# Altium PCB pwr_V1.1.PcbDoc (part 1 of 2)
Units mm, origin at the board's own origin, x right, y up, seen from the top; angles counter-clockwise.
Board outline 150.51 x 150.51 mm, 4 copper layers (Top Layer, GND, VCC, Bottom Layer); 133 components, 126 nets, 409 pads, 2275 vias.
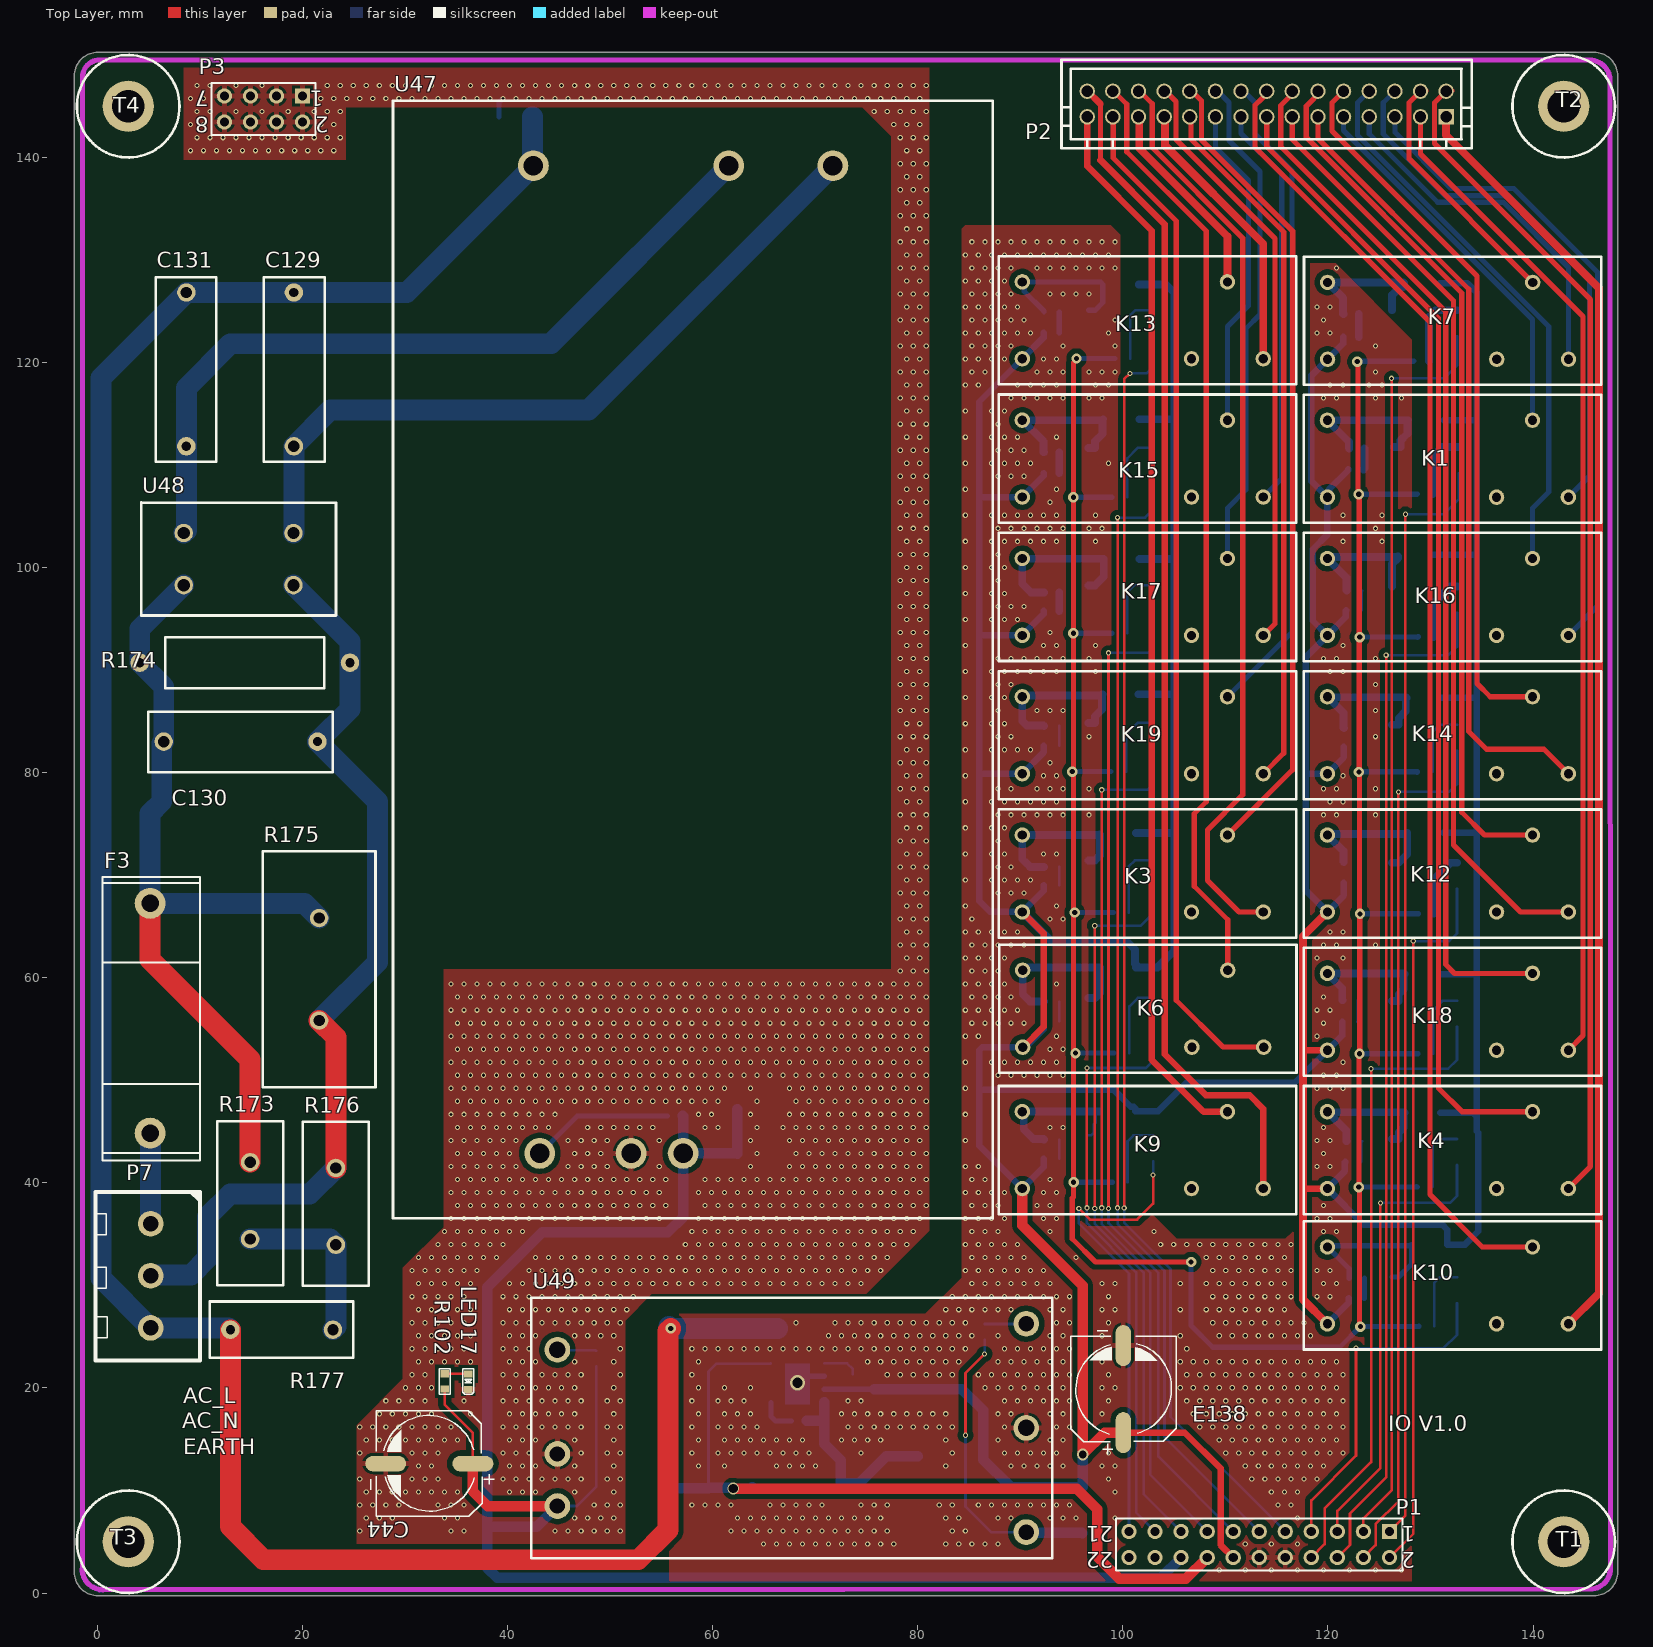
[diagram p0: Top Layer view]
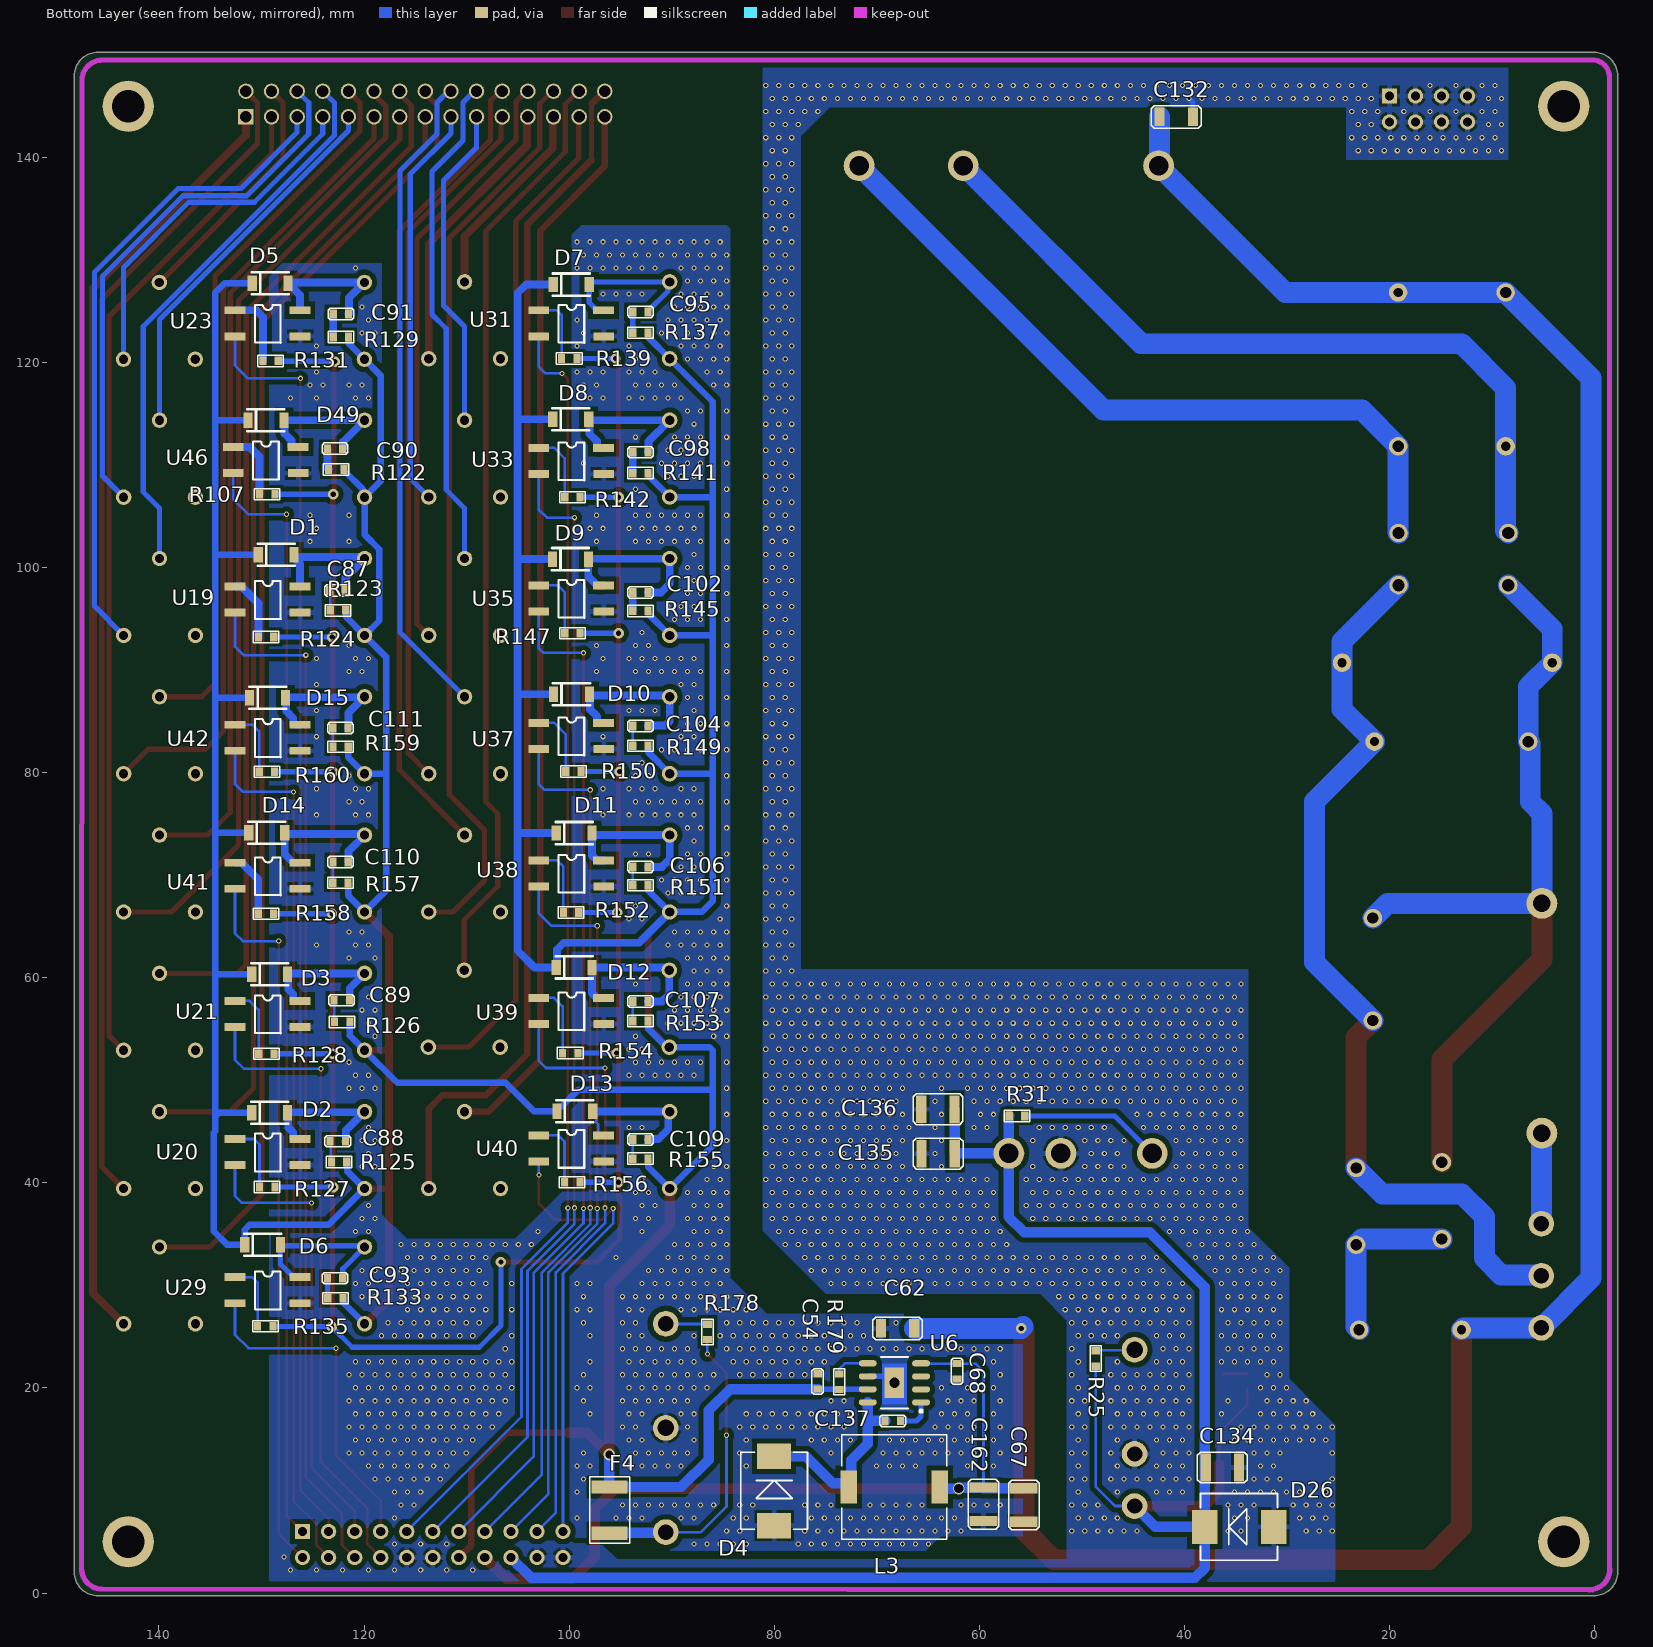
[diagram p1: Bottom Layer view, seen from below]

## Layer stack, top to bottom
Top Solder: solder mask 0.0102, Solder Resist, Dk 3.5
Top Layer: signal copper 0.0356
Dielectric1: core 0.32, FR-4, Dk 4.8
GND: signal copper 0.0356
Dielectric2: prepreg 0.32, FR-4, Dk 4.8
VCC: signal copper 0.0356
Dielectric3: core 0.32, FR-4, Dk 4.8
Bottom Layer: signal copper 0.0356
Bottom Solder: solder mask 0.0102, Solder Resist, Dk 3.5

## Board outline
0,-0.254 cw(c0,2) -2.254,2 -2.254,147.997 -2.254,148 cw(c0,148) 0,150.254 146,150.254 cw(c146,148) 148.254,148 148.254,2 cw(c146,2) 146,-0.254

## Design rules (kind name [scope] priority, off if disabled: settings)
Clearance [InPolygon] p1: gap=0.508 ignorepadtopadclearanceinfootprint=FALSE
Clearance Clearance_1 [All] p2: gap=0.127 ignorepadtopadclearanceinfootprint=FALSE
HoleToHoleClearance [All] p1: gap=0.127 allowstackedmicrovias=TRUE
MinimumSolderMaskSliver [All] p1: minsoldermaskwidth=0.127
PolygonConnect PolygonConnect_1 [IsVia] p1: connectstyle=Direct reliefconductorwidth=0.254 reliefentries=4 polygonreliefangle="90 Angle" airgapwidth=0.254
PolygonConnect [All] p2: connectstyle=Relief reliefconductorwidth=0.508 reliefentries=4 polygonreliefangle="90 Angle" airgapwidth=0.254
RoutingVias [All] p1: holewidth=0.254 width=0.508 viastyle="Through Hole" minholewidth=0.254 minwidth=0.508 maxholewidth=2.54 maxwidth=5.08
SilkToSilkClearance [All] p1: silktosilkclearance=0.127
SilkToSolderMaskClearance SilkscreenOverComponentPads [IsPad] p1: minsilkscreentomaskgap=0 clearancetoexposedcopper=TRUE
SolderMaskExpansion [All] p1: expansion=0.102 istentingtop=FALSE
Width [All] p1: maxlimit=5.08 minlimit=0.254 preferedwidth=0.254
26 further rules are at their usual default settings.

## Classes and differential pairs
net class N000-1_[0..19]: N000-1_0 N000-1_1 N000-1_2 N000-1_3 N000-1_4 N000-1_5 N000-1_6 N000-1_7 N000-1_8 N000-1_9 N000-1_10 N000-1_11 N000-1_12 N000-1_13 N000-1_14 N000-1_15 N000-1_16 N000-1_17 N000-1_18 N000-1_19
net class DO_O[0..19]: DO_O0 DO_O1 DO_O2 DO_O3 DO_O4 DO_O5 DO_O6 DO_O7 DO_O8 DO_O9 DO_O10 DO_O11 DO_O12 DO_O13 DO_O14 DO_O15 DO_O16 DO_O17 DO_O18 DO_O19
net class DO[0..19]: DO0 DO1 DO2 DO3 DO4 DO5 DO6 DO7 DO8 DO9 DO10 DO11 DO12 DO13 DO14 DO15 DO16 DO17 DO18 DO19
net class DI[0..11]: DI0 DI1 DI2 DI3 DI4 DI5 DI6 DI7 DI8 DI9 DI10 DI11
component class relay: K1 K3 K4 K6 K7 K9 K10 K12 K13 K14 K15 K16 K17 K18 K19 P2
component class power: C44 C54 C62 C67 C68 C129 C130 C131 C132 C134 C135 C136 C137 C162 D4 D26 E138 F3 F4 L3 LED17 P7 R25 R31 R102 R173 R174 R175 R176 R177 R178 R179 T1 T2 T3 T4 U6 U47 U48 U49
component class do: C87 C88 C89 C90 C91 C93 C95 C98 C102 C104 C106 C107 C109 C110 C111 D1 D2 D3 D5 D6 D7 D8 D9 D10 D11 D12 D13 D14 D15 D49 F1 P1 P3 R107 R122 R123 R124 R125 R126 R127 R128 R129 R131 R133 R135 R137 R139 R141 R142 R145 R147 R149 R150 R151 R152 R153 R154 R155 R156 R157 R158 R159 R160 U19 U20 U21 U23 U29 U31 U33 U35 U37 U38 U39 U40 U41 U42 U46

## Components (designator, comment, footprint, x,y, rotation, side; value= is the part's Value field where it differs from the comment)
C44 "220uF/50V" Φ10×10 32.36,12.624 r270 top
C54 "1uF" 0603C 75.768,21.387 r270 bottom
C62 "1nF/2kV" 1206C 69.595,25.806 r180 bottom
C67 "22uF/10V" 1210C 55.651,10.21 r270 bottom
C68 "0.1uF" 0603C 62.179,22.379 r270 bottom
C87 "0.1uF" 0603C 121.842,97.765 r0 bottom
C88 "0.1uF" 0603C 121.818,44.069 r0 bottom
C89 "0.1uF" 0603C 121.436,57.81 r0 bottom
C90 "0.1uF" 0603C 122.072,111.608 r0 bottom
C91 "0.1uF" 0603C 121.512,124.739 r0 bottom
C93 "0.1uF" 0603C 122.071,30.704 r0 bottom
C95 "0.1uF" 0603C 92.302,124.943 r0 bottom
C98 "0.1uF" 0603C 92.302,111.252 r0 bottom
C102 "0.1uF" 0603C 92.302,97.587 r0 bottom
C104 "0.1uF" 0603C 92.302,84.557 r0 bottom
C106 "0.1uF" 0603C 92.302,70.815 r0 bottom
C107 "0.1uF" 0603C 92.302,57.683 r0 bottom
C109 "0.1uF" 0603C 92.302,44.221 r0 bottom
C110 "0.1uF" 0603C 121.538,71.298 r0 bottom
C111 "0.1uF" 0603C 121.563,84.353 r0 bottom
C129 "2.2nF/400VAC" 15x18 19.152,126.836 r270 top value=22nF
C130 "0.15μF/300VAC" 15x18 21.458,83.033 r180 top value=22nF
C131 "2.2nF/400VAC" 15x18 8.668,111.836 r90 top value=22nF
C132 "1nF/2KV" 1206C 39.168,143.967 r0 bottom value=22nF
C134 "1uF/50V" 1210C 34.671,12.243 r0 bottom value=22nF
C135 "4.7uF/50V" 1210C 65.632,42.85 r180 bottom value=22nF
C136 "10uF/50V" 1210C 65.659,47.193 r180 bottom value=22nF
C137 "0.01uF" 0603C 69.19,16.789 r180 bottom
C162 "22uF/10V" 1210C 59.588,10.286 r270 bottom
D1 "LL4148" DO-213AB/LL34/MiniMELF 128.577,101.244 r180 bottom
D2 "LL4148" DO-213AB/LL34/MiniMELF 129.212,46.838 r180 bottom
D3 "LL4148" DO-213AB/LL34/MiniMELF 129.21,60.35 r180 bottom
D4 "SS54" SMC 80.01,6.579 r90 bottom
D5 "LL4148" DO-213AB/LL34/MiniMELF 129.159,127.737 r180 bottom
D6 "LL4148" DO-213AB/LL34/MiniMELF 129.896,33.981 r180 bottom
D7 "LL4148" DO-213AB/LL34/MiniMELF 99.797,127.61 r180 bottom
D8 "LL4148" DO-213AB/LL34/MiniMELF 99.847,114.478 r180 bottom
D9 "LL4148" DO-213AB/LL34/MiniMELF 99.873,100.838 r180 bottom
D10 "LL4148" DO-213AB/LL34/MiniMELF 99.771,87.655 r180 bottom
D11 "LL4148" DO-213AB/LL34/MiniMELF 99.517,74.117 r180 bottom
D12 "LL4148" DO-213AB/LL34/MiniMELF 99.517,61.011 r180 bottom
D13 "LL4148" DO-213AB/LL34/MiniMELF 99.441,46.99 r180 bottom
D14 "LL4148" DO-213AB/LL34/MiniMELF 129.489,74.143 r180 bottom
D15 "LL4148" DO-213AB/LL34/MiniMELF 129.413,87.3 r180 bottom
D26 "SMCJ30CA" SMC 31.274,6.452 r0 bottom
D49 "LL4148" DO-213AB/LL34/MiniMELF 129.565,114.376 r180 bottom
E138 "100uF/50V" Φ10×10 100.051,19.888 r180 top value=100pF
F3 "6.3A/250V" 可视开关电源保险丝座 5.131,44.856 r90 top
F4 "2A" 1812-F 96.063,5.842 r90 bottom
K1 "G2RL-1-H" G2RL-1-H 119.949,114.377 r0 top
K3 "G2RL-1-H" G2RL-1-H 90.195,73.921 r0 top
K4 "G2RL-1-H" G2RL-1-H 119.949,46.946 r0 top
K6 "G2RL-1-H" G2RL-1-H 90.231,60.738 r0 top
K7 "G2RL-1-H" G2RL-1-H 119.964,127.82 r0 top
K9 "G2RL-1-H" G2RL-1-H 90.195,46.946 r0 top
K10 "G2RL-1-H" G2RL-1-H 119.949,33.752 r0 top
K12 "G2RL-1-H" G2RL-1-H 119.949,73.919 r0 top
K13 "G2RL-1-H" G2RL-1-H 90.195,127.871 r0 top
K14 "G2RL-1-H" G2RL-1-H 119.949,87.405 r0 top
K15 "G2RL-1-H" G2RL-1-H 90.195,114.383 r0 top
K16 "G2RL-1-H" G2RL-1-H 119.949,100.891 r0 top
K17 "G2RL-1-H" G2RL-1-H 90.195,100.896 r0 top
K18 "G2RL-1-H" G2RL-1-H 119.949,60.432 r0 top
K19 "G2RL-1-H" G2RL-1-H 90.195,87.408 r0 top
L3 "CDRH105NP-100NC" CDRH105 73.396,5.238 r90 bottom
LED17 "5V" 0603LED 36.17,21.363 r270 top
P1 "XHD2.54mm 2*15" HDR2X11 126,6 r180 top locked
P2 "Header 15X2" CONN-TH_30P-P2.50_KH-A2557-2X15A 114.027,145.217 r0 top
P3 "Header 4X2" HDR2X4 20,146 r180 top locked
P7 "Header 3" KF128V-3P 5.188,36.017 r270 top
R25 "NC" 0603R 48.641,22.123 r90 bottom value=100K
R31 "NC" 0603r 55.575,46.533 r0 bottom value=100K
R102 "5.1K" 0603R 33.858,21.388 r270 top
R107 "510" 0603R 130.2,107.163 r180 bottom
R122 "51K" 0603R 123.471,109.576 r180 bottom
R123 "51K" 0603R 123.292,95.834 r180 bottom
R124 "510" 0603R 130.302,93.243 r180 bottom
R125 "51K" 0603R 123.19,42.037 r180 bottom
R126 "51K" 0603R 122.885,55.702 r180 bottom
R127 "510" 0603R 130.202,39.599 r180 bottom
R128 "510" 0603R 130.278,52.603 r180 bottom
R129 "51K" 0603R 123.014,122.504 r180 bottom
R131 "510" 0603R 129.87,120.167 r180 bottom
R133 "51K" 0603R 123.547,28.748 r180 bottom
R135 "510" 0603R 130.38,26.01 r180 bottom
R137 "51K" 0603R 93.802,122.911 r180 bottom
R139 "510" 0603R 100.738,120.396 r180 bottom
R141 "51K" 0603R 93.802,109.22 r180 bottom
R142 "510" 0603R 100.433,106.858 r180 bottom
R145 "51K" 0603R 93.802,95.783 r180 bottom
R147 "510" 0603R 100.432,93.599 r180 bottom
R149 "51K" 0603R 93.802,82.626 r180 bottom
R150 "510" 0603R 100.331,80.112 r180 bottom
R151 "51K" 0603R 93.802,69.037 r180 bottom
R152 "510" 0603R 100.559,66.37 r180 bottom
R153 "51K" 0603R 93.802,55.778 r180 bottom
R154 "510" 0603R 100.636,52.654 r180 bottom
R155 "51K" 0603R 93.802,42.367 r180 bottom
R156 "510" 0603R 100.457,40.056 r180 bottom
R157 "51K" 0603R 123.063,69.266 r180 bottom
R158 "510" 0603R 130.327,66.243 r180 bottom
R159 "51K" 0603R 123.038,82.525 r180 bottom
R160 "510" 0603R 130.226,80.086 r180 bottom
R173 "14D561K" 14D561K 14.891,34.519 r90 top
R174 "1MΩ/2W" 5x15.5 4.121,90.729 r0 top value=100K
R175 "20D471K" 20D471K 21.615,55.829 r90 top
R176 "14D561K" 14D561K 23.248,41.46 r270 top
R177 "B5G3600" B5G3600 12.961,25.679 r0 top
R178 "NC" 0603r 86.512,26.214 r270 bottom value=100K
R179 "100K" 0603R 73.66,21.361 r270 bottom
T1 "TP" M3 143,5 r0 top
T2 "TP" M3 143,145 r0 top
T3 "TP" M3 3,5 r0 top
T4 "TP" M3 3,145 r0 top
U6 "LM22676MRE-5.0/NOPB" SOP127P600X168_HS-8N 68.275,20.498 r0 bottom
U19 "AQY210S" sop4 132.588,98.156 r180 bottom
U20 "AQY210S" sop4 132.588,44.279 r180 bottom
U21 "AQY210S" sop4 132.588,57.749 r180 bottom
U23 "AQY210S" sop4 132.588,125.095 r180 bottom
U29 "AQY210S" sop4 132.588,30.81 r180 bottom
U31 "AQY210S" sop4 102.972,125.095 r180 bottom
U33 "AQY210S" sop4 102.972,111.684 r180 bottom
U35 "AQY210S" sop4 102.972,98.273 r180 bottom
U37 "AQY210S" sop4 102.972,84.861 r180 bottom
U38 "AQY210S" sop4 102.972,71.45 r180 bottom
U39 "AQY210S" sop4 102.972,58.039 r180 bottom
U40 "AQY210S" sop4 102.972,44.628 r180 bottom
U41 "AQY210S" sop4 132.588,71.218 r180 bottom
U42 "AQY210S" sop4 132.588,84.687 r180 bottom
U46 "AQY210S" sop4 132.766,111.76 r180 bottom
U47 "LHE60-20B24" LHE60-20B24 71.726,139.195 r270 top
U48 "FL2D-30-222" TY-100P 19.114,98.298 r180 top
U49 "URB24_LD-50WR3G" URB24_LD-50WR3G 42.316,16.104 r0 top

## Footprints (in the part's own frame and the unit in brackets; to place one, negate y for a bottom-side part, rotate by r counter-clockwise, add the part's x,y. Pads: shape width x height; smd on the part's side, far side on the other; paste and mask are expansions set on the pad)
5x15.5 [mm]
  round 1.8 hole 0.9: 1(0,0) 2(20.5,0)
  silkscreen extent 2.5,-2.5 18,2.5
14D561K [mm]
  round 1.8 hole 1.1: 1(0,0) 2(7.5,0)
  silkscreen extent -4.5,-3.21 11.5,3.21
15x18 [mm]
  round 1.8 hole 0.9: 1(0,0)
  round 1.8 hole 1.1: 2(15,0)
  silkscreen extent -1.5,-2.92 16.5,3
20D471K [mm]
  round 1.8 hole 1.1: 1(0,0) 2(10,0)
  silkscreen extent -6.5,-5.5 16.5,5.5
0603C [mm]
  rect 0.7x0.85 smd: 1(0,0) 2(1.5,0)
  silkscreen extent -0.5,-0.55 2,0.55
0603LED [mm]
  rect 0.7x0.85 smd: 1(0,0) 2(1.5,0)
  silkscreen extent -0.5,-0.55 2,0.55
0603R [mm]
  rect 0.7x0.85 smd: 1(0,0) 2(1.5,0)
  silkscreen extent -0.5,-0.55 2,0.55
0603r [mm]
  rect 0.7x0.85 smd: 1(0,0) 2(1.5,0)
  silkscreen extent -0.5,-0.55 2,0.55
1206C [mm]
  rect 1x1.8 smd: 1(0,0) 2(3.25,0)
  silkscreen extent -0.8,-1.1 4.05,1.1
1210C [mm]
  rect 1x2.7 smd: 1(0,0) 2(3.25,0)
  silkscreen extent -0.8,-1.5 4.05,1.5
1812-F [mm]
  rect 1.3x3.5 smd: 1(0,0) 2(4.5,0)
  silkscreen extent -1,-1.95 5.5,1.95
B5G3600 [mm]
  round 1.8 hole 0.9: 1(0,0)
  round 1.8 hole 1.1: 2(10,0)
  silkscreen extent -2,-2.75 12,2.75
CDRH105 [mm]
  rect 3.2x1.6 smd: 1(5.1,-0.65) 2(5.1,-9.55)
  silkscreen extent 0,-10.2 10.2,0
CONN-TH_30P-P2.50_KH-A2557-2X15A [mm]
  rect 1.5x1.5 hole 1.1 paste-2539.97 mask+0.05: 1(17.5,-1.25)
  round 1.5 hole 1.1 paste-2539.97 mask+0.05: 2(17.5,1.25) 3(15,-1.25) 4(15,1.25) 5(12.5,-1.25) 6(12.5,1.25) 7(10,-1.25) 8(10,1.25) 9(7.5,-1.25) 10(7.5,1.25) 11(5,-1.25) 12(5,1.25) 13(2.5,-1.25) 14(2.5,1.25) 15(0,-1.25) 16(0,1.25) 17(-2.5,-1.25) 18(-2.5,1.25) 19(-5,-1.25) 20(-5,1.25) 21(-7.5,-1.25) 22(-7.5,1.25) 23(-10,-1.25) 24(-10,1.25) 25(-12.5,-1.25) 26(-12.5,1.25) 27(-15,-1.25) 28(-15,1.25) 29(-17.5,-1.25) 30(-17.5,1.25)
  silkscreen extent -20.01,-4.3 20.01,4.3
DO-213AB/LL34/MiniMELF [mm]
  rect 0.9x1.5 smd: 1(1.75,0) 2(-1.75,0)
  silkscreen extent -1.8,-1.08 1.8,1.08
G2RL-1-H [mm]
  round 1.5 hole 0.9: 1(20,0) 2(16.5,-7.5) 3(23.5,-7.5) 4(0,-7.5) 5(0,0)
  silkscreen extent -2.3,-10 26.7,2.5
HDR2X4 [mm] "Connector; Header; 4x2 Position"
  rect 1.5x1.5 hole 0.9: 1(0,0)
  round 1.5 hole 0.9: 2(0,2.54) 3(2.54,0) 4(2.54,2.54) 5(5.08,0) 6(5.08,2.54) 7(7.62,0) 8(7.62,2.54)
  silkscreen extent -1.27,-1.27 8.89,3.81
HDR2X11 [mm] "Connector; Header; 11x2 Position"
  rect 1.5x1.5 hole 0.9: 1(0,0)
  round 1.5 hole 0.9: 2(0,2.54) 3(2.54,0) 4(2.54,2.54) 5(5.08,0) 6(5.08,2.54) 7(7.62,0) 8(7.62,2.54) 9(10.16,0) 10(10.16,2.54) 11(12.7,0) 12(12.7,2.54) 13(15.24,0) 14(15.24,2.54) 15(17.78,0) 16(17.78,2.54) 17(20.32,0) 18(20.32,2.54) 19(22.86,0) 20(22.86,2.54) 21(25.4,0) 22(25.4,2.54)
  silkscreen extent -1.27,-1.27 26.67,3.81
KF128V-3P [mm]
  round 2.5 hole 1.5: 1(0,0) 2(5.08,0) 3(10.16,0)
  silkscreen extent -3.1,-5.4 13.33,4.8
LHE60-20B24 [mm]
  round 3 hole 1.9: 1(0,0) 2(0,-10.16) 3(0,-29.21) 4(96.32,-28.59) 5(96.32,-19.69) 6(96.32,-14.61)
  silkscreen extent -6.34,-42.9 102.66,15.6
M3 [mm]
  round 5 hole 3.2 unplated: 1(0,0)
  silkscreen extent -5,-5 5,5
SMC [mm]
  rect 2.5x3.3 smd: 1(0,0) 2(6.75,0)
  silkscreen extent -0.35,-3.25 7.15,3.25
sop4 [mil]
  rect 80x30 smd: 1(0,0) 2(0,-100) 3(250,-100) 4(249,0)
  silkscreen extent 76,-125 176,21
SOP127P600X168_HS-8N [mm] "SOP, 8-Leads, Body 5.0x4.0mm (max), Pitch 1.27mm, IPC Medium Density"
  oval 1.75x0.6 smd: 1(-2.6,1.905) 2(-2.6,0.635) 3(-2.6,-0.635) 4(-2.6,-1.905) 5(2.6,-1.905) 6(2.6,-0.635) 7(2.6,0.635) 8(2.6,1.905)
  rect 1.9x3 smd: 9(0,0)
  silkscreen extent -2.72,-2.5 1.33,2.88, body extent -2,-2.5 2,2.5, height 1.68
TY-100P [mm]
  round 1.8 hole 1.2: 1(0,0) 2(10.7,0) 3(10.7,-5.08) 4(0,-5.08)
  silkscreen extent -4.15,-8.08 14.86,2.96
URB24_LD-50WR3G [mm]
  round 2.5 hole 1.6: 1(2.54,7.62) 5(48.26,0)
  round 2.5 hole 1.5: 2(2.54,-2.54) 3(2.54,-7.62) 4(48.26,-10.16) 6(48.26,10.16)
  silkscreen extent 0,-12.7 50.8,12.7
Φ10×10 [mm]
  oval 1.524x4 smd: 1(0,4.25) 2(0,-4.25)
  silkscreen extent -5.15,-5.71 5.15,6.35
可视开关电源保险丝座 [mm]
  round 3 hole 1.7: 1(0,0) 2(22.4,0)
  silkscreen extent -2.69,-4.86 24.98,4.64

## Part data
C44 E138: library part "Cap Pol1", "Polarized Capacitor (Radial)", LatestRevisionDate=17-Jul-2002, LatestRevisionNote="Re-released for DXP Platform.", PackageReference=RB7.6-15, Published=8-Jun-2000, Publisher="Altium Limited"
C54 C62 C67 C68 C87 C88 C89 C90 C91 C93 C95 C98 C102 C104 C106 C107 C109 C110 C111 C137 C162: library part CAP, "Capacitor"
C129 C130 C131 C132 C134 C135 C136: library part Cap, "Capacitor", LatestRevisionDate=17-Jul-2002, LatestRevisionNote="Re-released for DXP Platform.", PackageDescription="Radial Cap, Thru-Hole; 2 Leads; 0.3 in Pin Spacing", PackageReference=RAD-0.3, Published=8-Jun-2000, Publisher="Altium Limited"
D1 D2 D3 D5 D6 D7 D8 D9 D10 D11 D12 D13 D14 D15 D49: "VISHAY,LL4148,圆柱体MiniMELF100V/2A,ROHS", 制造商=VISHAY, 名称=快速开关二极管, 版本=V1.00, 物料编号=APLLY
D4 D26: library part "DIODE S", "Schottky Diode"
F3 F4: library part "Fuse 1", "Fuse", LatestRevisionDate=17-Jul-2002, LatestRevisionNote="Re-released for DXP Platform.", PackageDescription="Thru-Hole; 2 Leads", PackageReference=PIN-W2/E2.8, Published=8-Jun-2000, Publisher="Altium Limited"
K1 K3 K4 K6 K7 K9 K10 K12 K13 K14 K15 K16 K17 K18 K19: library part Relay-SPDT, "Single-Pole Dual-Throw Relay", LatestRevisionDate=17-Jul-2002, LatestRevisionNote="Re-released for DXP Platform.", PackageReference=MODULE5B, Published=24-Mar-1999, Publisher="Altium Limited"
L3: library part INDUCTOR
LED17: library part LED
P1: library part "Header 11X2", "Header, 11-Pin, Dual row", LatestRevisionDate=17-Jul-2002, LatestRevisionNote="Re-released for DXP Platform.", Publisher="Altium Limited"
P2: "Header, 15-Pin, Dual row", LatestRevisionDate=17-Jul-2002, LatestRevisionNote="Re-released for DXP Platform.", Publisher="Altium Limited"
P3: "Header, 4-Pin, Dual row", LatestRevisionDate=17-Jul-2002, LatestRevisionNote="Re-released for DXP Platform.", Publisher="Altium Limited"
P7: "Header, 3-Pin", LatestRevisionDate=17-Jul-2002, LatestRevisionNote="Re-released for DXP Platform.", Publisher="Altium Limited"
R25 R31 R174 R178: library part RES0603, ID=233, 制造商=三星/YAGEO, 参数值=1.00E+04, 器件等级=——, 工作温度="–55°C to 155°C", 序号=109, 物料主编码(PN)=150000040, 物料名称=贴片电阻, 物料描述=RES,贴片电阻,0603,10k,±1%,1/10W,1.6X0.8X0.45mm,RC1608F103CS/RC0603FR-0710KL, 物料类型=表贴电阻, 精度=±1%, 规格型号(完整型号)=RC1608F103CS/RC0603FR-0710KL
R102: library part R, "R"
R107 R124 R127 R128 R131 R135 R139 R142 R147 R150 R152 R154 R156 R158 R160: library part RES2
R122 R123 R125 R126 R129 R133 R137 R141 R145 R149 R151 R153 R155 R157 R159: library part Res0805M
R173 R175 R176 R177: library part "Res Varistor", "Varistor (Voltage-Sensitive Resistor)", Code_IPC=RESC2012, LatestRevisionDate=29-May-2009, LatestRevisionNote="IPC-7351 Footprint Added.", PackageDescription="Chip Resistor 0805 Case Size", PackageReference=6-0805, PackageVersion=Mar-2003, Published=24-Mar-1999, Publisher="Altium Limited"
R179: library part Res1, "Resistor", LatestRevisionDate=17-Jul-2002, LatestRevisionNote="Re-released for DXP Platform.", PackageReference=AXIAL-0.3, Published=8-Jun-2000, Publisher="Altium Limited"
U6: library part LM22676MR-5.0
U19 U20 U21 U23 U29 U31 U33 U35 U37 U38 U39 U40 U41 U42 U46: library part Optoisolator1, "4-Pin Phototransistor Optocoupler", DatasheetVersion=Nov-2003, LatestRevisionDate=04-Mar-2005, LatestRevisionNote="Sch pins 3 & 4 Swapped.", PackageReference=DIP-4, Published=24-Mar-1999, Publisher="Altium Limited"
U48: library part TY-100P, "PCB mounting filters"

## Via types
v1: diameter 0.508, hole 0.305, Top Layer to Bottom Layer, tented both sides, 2255 vias
v2: diameter 1.016, hole 0.508, Top Layer to Bottom Layer, tented both sides, 17 vias
v3: diameter 1.143, hole 0.889, Top Layer to Bottom Layer, tented both sides, 1 vias
v4: diameter 1.143, hole 0.762, Top Layer to Bottom Layer, tented both sides, 1 vias
v5: diameter 1.5, hole 1, Top Layer to Bottom Layer, 1 vias

## Nets (pads, with @x,y where several pads share a name; then routed paths per layer and width w, separated by ;. In a path a pad name is that pad's centre, name@x,y a point inside that pad or via, vN(x,y) a via of type N, cw(c..) or ccw(c..) an arc to the next point about the centre after c; other vN are vias at no path point)
3.3V_ISO: R107.2 R124.2 R127.2 R128.2 R131.2 R135.2 R139.2 R142.2 R147.2 R150.2 R152.2 R154.2 R156.2 R158.2 R160.2 | length 289.6
  Top Layer w0.508: v2(95.48,120.396) 95.48,120.259 95.199,119.978 v2(95.199,40.056) 95.199,38.636 95.072,38.509 95.072,34.544 97.333,32.283 v2(106.655,32.283) ; v2(122.86,120.091) 122.929,120.022 122.929,107.219 v2(122.998,107.15) 123.049,107.099 123.049,93.282 v2(123.1,93.231) 123.062,93.193 123.062,80.112 v2(123.024,80.074) 123.074,80.023 123.074,66.281 v2(123.125,66.231) 123.1,66.206 123.1,52.615 v2(123.076,52.591) 123.038,52.553 123.038,39.624 v2(122.999,39.586) 123.082,39.503 123.082,26.067 v2(123.165,25.984)
  Bottom Layer w0.508: v2(95.074,80.112) R150.2@98.831,80.112 ; v2(95.174,93.599) R147.2@98.932,93.599 ; v2(95.175,106.858) R142.2@98.933,106.858 ; v2(95.199,40.056) R156.2@98.957,40.056 ; v2(95.301,66.37) R152.2@99.059,66.37 ; v2(95.378,52.654) R154.2@99.136,52.654 ; v2(95.48,120.396) R139.2@99.238,120.396 ; v2(106.655,32.283) 106.655,26.086 108.763,23.978 121.158,23.978 v2(123.165,25.984) 123.177,25.997 128.867,25.997 R135.2@128.88,26.01 ; v2(122.86,120.091) 122.898,120.129 128.332,120.129 R131.2@128.37,120.167 ; v2(122.998,107.15) 123.011,107.163 R107.2@128.7,107.163 R107.2@128.713,107.175 ; v2(122.999,39.586) 123.012,39.599 R127.2@128.702,39.599 ; v2(123.024,80.074) 123.036,80.086 R160.2@128.726,80.086 ; v2(123.076,52.591) 123.088,52.603 R128.2@128.778,52.603 ; v2(123.1,93.231) 123.112,93.243 R124.2@128.802,93.243 ; v2(123.125,66.231) 123.138,66.243 R158.2@128.827,66.243 ; R127.2@128.651,39.649 R127.2@128.702,39.599 ; R160.2@128.675,80.035 R160.2@128.726,80.086 ; R127.2@128.714,39.611 R127.2@128.702,39.599 ; R160.2@128.739,80.099 R160.2@128.726,80.086 ; R124.2@128.739,93.18 R124.2@128.802,93.243 ; R128.2@128.765,52.616 R128.2@128.778,52.603 ; R128.2@128.791,52.616 R128.2@128.778,52.603 ; R158.2@128.802,66.218 R158.2@128.827,66.243 ; R124.2@128.815,93.256 R124.2@128.802,93.243 ; R158.2@128.84,66.256 R158.2@128.827,66.243
24V_F: C54.2 D1.2 D2.2 D3.2 D5.2 D6.2 D7.2 D8.2 D9.2 D10.2 D11.2 D12.2 D13.2 D14.2 D15.2 D49.2 E138.1 F4.2 K1.4 K3.4 K4.4 K6.4 K7.4 K9.4 K10.4 K12.4 K13.4 K14.4 K15.4 K16.4 K17.4 K18.4 K19.4 P1.14 R122.2 R123.2 R125.2 R126.2 R129.2 R133.2 R137.2 R141.2 R145.2 R149.2 R151.2 R153.2 R155.2 R157.2 R159.2 R179.2 U6.7 | length 626.6
  Top Layer w0.635: K3.4@90.195,66.421 92.27,64.347 92.27,55.228 90.28,53.238 K6.4@90.231,53.238 ; E138.1@100.051,15.638 106.045,15.638 109.525,12.158 109.525,4.695 P1.14@110.76,3.46 ; 117.577,39.497 117.627,39.446 K4.4@119.949,39.446 ; 117.577,52.832 117.677,52.932 K18.4@119.949,52.932
  Top Layer w0.762: K10.4@119.949,26.252 117.577,28.624 117.577,39.497 117.577,52.832 117.577,64.046 K12.4@119.949,66.419
  Top Layer w1.016: K9.4@90.195,39.446 90.195,35.865 96.088,29.972 v4(96.088,13.513) 98.214,15.638 E138.1@100.051,15.638
  Bottom Layer w0.508: U6.7@70.875,19.863 70.887,19.875 75.756,19.875 C54.2@75.768,19.887
  Bottom Layer w0.635: K6.4@90.231,53.238 86.309,53.238 86.004,52.934 86.004,49.098 ; K6.4@90.365,53.104 92.27,55.008 92.27,55.746 R153.2@92.302,55.778 ; R155.2@92.302,42.367 92.27,42.335 92.27,41.52 K9.4@90.195,39.446 86.004,43.637 86.004,49.098 ; R151.2@92.302,69.037 92.27,69.005 92.27,68.495 K3.4@90.195,66.421 87.071,66.421 86.004,67.488 86.004,80.01 ; R149.2@92.302,82.626 92.27,82.594 92.27,81.983 K19.4@90.195,79.908 86.106,79.908 86.004,80.01 ; R145.2@92.302,95.783 92.27,95.751 92.27,95.47 K17.4@90.195,93.396 86.055,93.396 86.004,93.447 ; R141.2@92.302,109.22 92.27,109.187 92.27,108.957 K15.4@90.195,106.883 86.182,106.883 86.004,106.705 ; R137.2@92.302,122.911 92.27,122.878 92.27,122.445 K13.4@90.195,120.371 86.004,116.18 86.004,106.705 ; K10.4@119.949,26.252 122.014,28.318 122.014,28.716 R133.2@122.047,28.748 ; R126.2@121.385,55.702 121.385,54.369 K18.4@119.949,52.932 116.775,49.759 106.197,49.759 103.429,46.99 D13.2@101.191,46.99 101.191,47.29 101.058,47.423 100.758,47.423 99.083,49.098 86.004,49.098 ; R129.2@121.514,122.504 121.481,122.472 121.481,121.837 K7.4@119.964,120.32 118.389,118.745 118.389,108.437 K1.4@119.949,106.877 ; R159.2@121.538,82.525 121.538,81.494 K14.4@119.949,79.905 117.856,79.905 ; R157.2@121.563,69.266 121.563,68.033 K12.4@119.949,66.419 117.856,68.511 117.856,79.905 ; R125.2@121.69,42.037 121.657,42.004 121.657,41.155 K4.4@119.949,39.446 123.479,35.916 131.166,35.916 131.646,35.436 D6.2@131.646,33.981 133.371,33.981 134.671,35.281 134.671,44.882 134.514,45.039 134.514,46.457 ; R123.2@121.792,95.834 121.759,95.802 121.759,95.201 K16.4@119.949,93.391 ; R122.2@121.971,109.576 121.971,109.501 120.114,107.644 120.114,107.043 K1.4@119.949,106.877 ; D1.2@130.327,101.244 134.361,101.244 134.514,101.092 ; D5.2@130.909,127.737 133.604,127.737 134.514,126.827 134.514,114.503 ; D3.2@130.96,60.35 134.432,60.35 134.514,60.432 ; D2.2@130.962,46.838 134.133,46.838 134.514,46.457 ; D15.2@131.163,87.3 134.361,87.3 134.514,87.147 ; D14.2@131.239,74.143 134.412,74.143 134.514,74.041 ; D49.2@131.315,114.376 134.387,114.376 134.514,114.503 ; 86.004,80.01 86.004,93.447 ; 86.004,93.447 86.004,106.705 ; 117.856,79.905 117.856,91.298 K16.4@119.949,93.391 ; K16.4@119.949,93.391 118.516,94.824 118.516,101.793 119.949,103.225 K1.4@119.949,106.877 ; 134.514,46.457 134.514,60.432 ; 134.514,60.432 134.514,74.041 ; 134.514,74.041 134.514,87.147 ; 134.514,87.147 134.514,101.092 ; 134.514,101.092 134.514,114.503
  Bottom Layer w0.762: K3.4@90.195,66.421 93.193,63.424 100.519,63.424 101.198,62.744 101.198,61.38 101.267,61.311 D12.2@101.267,61.011 103.378,61.011 105.004,62.636 105.004,74.346 ; D11.2@101.267,74.117 104.775,74.117 105.004,74.346 ; D10.2@101.521,87.655 104.851,87.655 105.004,87.503 ; D7.2@101.547,127.61 104.191,127.61 105.004,126.797 105.004,114.427 ; D8.2@101.597,114.478 104.953,114.478 105.004,114.427 ; D9.2@101.623,100.838 104.826,100.838 105.004,101.016 ; 105.004,74.346 105.004,87.503 ; 105.004,87.503 105.004,101.016 ; 105.004,101.016 105.004,114.427
  Bottom Layer w1.016: C54.2@75.768,19.887 84.304,19.887 86.385,17.806 86.385,13.005 89.048,10.342 F4.2@96.063,10.342 96.088,10.367 v4(96.088,13.513)
24V_IN: C44.1 C134.2 C135.2 C136.2 D26.2 P1.18 R25.1 R31.2 R102.2 U47.6 U49.3 | length 181.6
  Top Layer w0.254: R102.2@33.858,19.888 33.858,18.364 36.61,15.613 C44.1@36.61,12.624
  Top Layer w1.016: C44.1@36.61,12.624 36.61,9.949 38.075,8.484 U49.3@44.856,8.484
  Bottom Layer w0.254: U49.3@44.856,8.484 46.761,8.484 48.641,10.363 R25.1@48.641,22.123
  Bottom Layer w1.016: U49.3@44.856,8.484 42.824,6.452 D26.2@38.024,6.452 ; R31.2@57.075,46.533 57.116,46.492 U47.6@57.116,42.875 ; C135.2@62.382,42.85 C135.2@62.382,42.867 ; C136.2@62.409,47.193 62.401,47.185 62.401,45.742 62.382,45.724 C135.2@62.382,42.867 ; P1.18@105.68,3.46 103.693,1.473 38.989,1.473 38.024,2.438 D26.2@38.024,6.452 ; D26.2@38.024,6.452 38.024,29.845 43.358,35.179 55.626,35.179 57.116,36.669 U47.6@57.116,42.875 ; U47.6@57.116,42.875 62.374,42.875 C135.2@62.382,42.867
AC_L: C131.1 U47.2 U48.3 | length 76.1
  Bottom Layer w2.032: U48.3@8.414,103.378 8.668,103.632 C131.1@8.668,111.836 8.668,117.532 12.979,121.844 44.214,121.844 U47.2@61.566,139.195
AC_N: C129.2 U47.1 U48.4 | length 72.4
  Bottom Layer w2.032: U48.4@19.114,103.378 19.152,103.416 C129.2@19.152,111.836 22.682,115.367 47.897,115.367 U47.1@71.726,139.195
DO_0: C90.1 D49.1 K1.5 U46.4 | length 15.1
  Bottom Layer w0.762: C90.1@122.072,111.608 122.041,111.639 122.041,112.285 119.949,114.377 D49.1@127.815,114.376 ; U46.4@126.441,111.76 127.076,111.76 127.076,112.395 127.746,113.065 127.746,114.307 D49.1@127.815,114.376
DO_1: C88.1 D2.1 K4.5 U20.4 | length 14.6
  Bottom Layer w0.762: K4.5@119.949,46.946 K4.5@120.003,46.892 ; C88.1@121.818,44.069 121.787,44.1 121.787,45.108 K4.5@120.003,46.892 ; U20.4@126.263,44.279 126.898,44.279 126.898,44.914 127.393,45.409 127.393,46.769 D2.1@127.462,46.838 127.408,46.892 K4.5@120.003,46.892
DO_2: C91.1 D5.1 K7.5 U23.4 | length 14.5
  Bottom Layer w0.762: C91.1@121.512,124.739 121.481,124.77 121.481,126.303 K7.5@119.964,127.82 127.34,127.82 127.409,127.751 D5.1@127.409,127.737 127.409,127.437 127.34,127.368 127.04,127.368 126.263,126.591 U23.4@126.263,125.095
DO_3: C93.1 D6.1 K10.5 U29.4 | length 16.5
  Bottom Layer w0.508: C93.1@122.071,30.704 122.071,31.63 K10.5@119.949,33.752 120.063,33.866 128.031,33.866 D6.1@128.146,33.981 128.146,32.057 126.898,30.81 U29.4@126.263,30.81
DO_4: C95.1 D7.1 K13.5 U31.4 | length 14.9
  Bottom Layer w0.508: C95.1@92.302,124.943 92.302,125.018 90.385,126.935 90.385,127.681 K13.5@90.195,127.871 D7.1@97.851,127.871 ; U31.4@96.647,125.095 97.282,125.095 98.047,125.86 D7.1@98.047,127.61
DO_5: C98.1 D8.1 K15.5 U33.4 | length 15.6
  Bottom Layer w0.762: C98.1@92.302,111.252 92.271,111.283 92.271,112.307 K15.5@90.195,114.383 D8.1@98.028,114.383 ; U33.4@96.647,111.684 97.282,111.684 97.282,112.319 98.028,113.065 D8.1@98.028,114.383 ; D8.1@98.097,114.478 98.028,114.409 D8.1@98.028,114.383
DO_6: C102.1 D9.1 K17.5 U35.4 | length 16.4
  Bottom Layer w0.762: C102.1@92.302,97.587 91.034,97.587 90.195,98.425 K17.5@90.195,100.896 90.224,100.867 98.094,100.867 D9.1@98.123,100.838 98.146,100.815 98.146,99.136 97.282,98.273 U35.4@96.647,98.273
DO_7: C104.1 D10.1 K19.5 U37.4 | length 16.2
  Bottom Layer w0.762: C104.1@92.302,84.557 92.302,84.57 92.271,84.601 90.642,84.601 90.195,85.047 K19.5@90.195,87.408 90.319,87.532 D10.1@97.952,87.532 ; U37.4@96.647,84.861 97.282,84.861 97.282,85.496 97.952,86.167 D10.1@97.952,87.532 ; D10.1@98.021,87.655 97.952,87.586 D10.1@97.952,87.532
DO_8: C106.1 D11.1 K3.5 U38.4 | length 15.7
  Bottom Layer w0.762: C106.1@92.302,70.815 90.957,70.815 90.526,71.247 90.195,71.577 K3.5@90.195,73.921 97.698,73.921 97.767,73.99 97.767,71.935 97.282,71.45 U38.4@96.647,71.45
DO_9: C107.1 D12.1 K6.5 U39.4 | length 16.2
  Bottom Layer w0.762: C107.1@92.302,57.683 90.957,57.683 90.231,58.41 K6.5@90.231,60.738 90.431,60.738 90.703,61.011 D12.1@97.767,61.011 97.767,58.524 97.282,58.039 U39.4@96.647,58.039
DO_10: C109.1 D13.1 K9.5 U40.4 | length 14.6
  Bottom Layer w0.254: U40.4@96.647,44.628 96.901,44.628 97.155,44.882 97.155,45.695 97.368,45.908 97.368,46.667 97.669,46.968 D13.1@97.691,46.99
  Bottom Layer w0.762: C109.1@92.302,44.221 92.302,44.234 92.271,44.265 91.294,44.265 90.337,45.223 90.337,46.805 K9.5@90.195,46.946 90.217,46.968 D13.1@97.669,46.968
DO_11: C110.1 D14.1 K12.5 U41.4 | length 15.1
  Bottom Layer w0.762: C110.1@121.538,71.298 121.507,71.329 121.507,72.361 K12.5@119.949,73.919 120.061,74.031 127.67,74.031 D14.1@127.739,74.1 ; U41.4@126.263,71.218 126.898,71.218 127.739,72.059 D14.1@127.739,74.1 ; D14.1@127.739,74.143 D14.1@127.739,74.1
DO_12: C111.1 D15.1 K14.5 U42.4 | length 15
  Bottom Layer w0.762: K14.5@119.949,87.405 K14.5@120.001,87.352 ; C111.1@121.563,84.353 121.532,84.384 121.532,85.822 K14.5@120.001,87.352 ; U42.4@126.263,84.687 126.898,84.687 126.898,85.322 127.594,86.018 127.594,87.231 D15.1@127.663,87.3 127.61,87.352 K14.5@120.001,87.352
DO_13: C87.1 D1.1 K16.5 U19.4 | length 14.1
  Bottom Layer w0.762: C87.1@121.842,97.765 121.811,97.796 121.811,99.029 K16.5@119.949,100.891 120.09,101.032 126.758,101.032 126.827,101.101 126.827,100.944 126.263,100.38 U19.4@126.263,98.156
DO_14: C89.1 D3.1 K18.5 U21.4 | length 14.3
  Bottom Layer w0.762: C89.1@121.436,57.81 121.405,57.841 121.405,58.976 K18.5@119.949,60.432 127.391,60.432 127.46,60.363 D3.1@127.46,60.35 127.391,60.281 127.391,58.876 126.898,58.384 126.898,57.749 U21.4@126.263,57.749
DO_CTRL_0: P1.1 U46.2 | length 108.2
  Top Layer w0.254: P1.1@126,6 127.559,7.559 v1(127.559,105.207)
  Bottom Layer w0.254: v1(127.559,105.207) 131.267,105.207 132.766,106.705 U46.2@132.766,109.22
DO_CTRL_1: P1.3 U23.2 | length 123.3
  Top Layer w0.254: P1.3@123.46,6 123.46,7.27 126.213,10.023 v1(126.213,118.466)
  Bottom Layer w0.254: v1(126.213,118.466) 131.343,118.466 132.588,119.71 U23.2@132.588,122.555
DO_CTRL_2: P1.5 U20.2 | length 44.5
  Top Layer w0.254: P1.5@120.92,6 120.92,8.001 125.12,12.201 v1(125.12,38.049)
  Bottom Layer w0.254: v1(125.12,38.049) 131.902,38.049 132.588,38.735 U20.2@132.588,41.739
DO_CTRL_3: P1.7 U29.2 | length 33.2
  Top Layer w0.254: P1.7@118.38,6 118.38,9.042 122.733,13.395 v1(122.733,23.876)
  Bottom Layer w0.254: v1(122.733,23.876) 131.293,23.876 132.588,25.171 U29.2@132.588,28.27
DO_CTRL_4: P1.9 U31.2 | length 125.2
  Top Layer w0.254: v1(100.127,37.541) 100.127,118.389 v1(100.686,118.948)
  Bottom Layer w0.254: v1(100.127,37.541) 100.127,36.119 104.648,31.598 104.648,17.192 P1.9@115.84,6 ; v1@100.66,118.948 v1(100.686,118.948) 102.311,118.948 102.972,119.609 U31.2@102.972,122.555
DO_CTRL_5: P1.11 U33.2 | length 111.9
  Top Layer w0.254: v1(99.492,37.567) v1(99.492,104.877)
  Bottom Layer w0.254: v1(99.492,37.567) 99.492,35.992 104.064,31.42 104.064,15.236 P1.11@113.3,6 ; v1(99.492,104.877) 102.159,104.877 102.972,105.689 U33.2@102.972,109.144
DO_CTRL_6: P1.13 U35.2 | length 98.9
  Top Layer w0.254: v1(98.603,37.516) v1(98.603,91.694)
  Bottom Layer w0.254: v1(98.603,37.516) 98.603,36.068 103.454,31.217 103.454,13.306 P1.13@110.76,6 ; v1(98.603,91.694) 102.514,91.694 102.972,92.151 U35.2@102.972,95.733
DO_CTRL_7: P1.15 U37.2 | length 85.3
  Top Layer w0.254: v1(97.942,37.567) v1(97.942,78.334)
  Bottom Layer w0.254: v1@97.917,78.334 v1(97.942,78.334) 102.413,78.334 102.972,78.892 U37.2@102.972,82.321 ; v1(97.942,37.567) 97.942,35.966 102.667,31.242 102.667,11.553 P1.15@108.22,6
DO_CTRL_8: P1.17 U38.2 | length 71.4
  Top Layer w0.254: v1(97.257,37.516) v1(97.257,65.075)
  Bottom Layer w0.254: v1(97.257,37.516) 97.257,36.043 102.032,31.267 102.032,9.648 P1.17@105.68,6 ; v1(97.257,65.075) 101.727,65.075 102.972,66.319 U38.2@102.972,68.91
DO_CTRL_9: P1.19 U39.2 | length 58.3
  Top Layer w0.254: v1(96.495,37.567) v1(96.495,51.206)
  Bottom Layer w0.254: v1(96.495,37.567) 96.495,36.068 101.295,31.267 101.295,7.845 P1.19@103.14,6 ; v1(96.495,51.206) 102.235,51.206 102.972,51.943 U39.2@102.972,55.499
DO_CTRL_10: P1.21 U40.2 | length 46
  Top Layer w0.254: v1(95.707,37.49) 96.774,36.424 101.397,36.424 102.946,37.973 v1(102.946,40.767)
  Bottom Layer w0.254: v1(95.707,37.49) 95.707,36.059 100.6,31.166 P1.21@100.6,6 ; v1(102.946,40.767) 102.946,42.062 U40.2@102.972,42.088
DO_CTRL_11: P1.2 U41.2 | length 70.1
  Top Layer w0.254: P1.2@126,3.46 128.321,5.781 v1@128.321,63.627
  Bottom Layer w0.254: v1@128.311,63.57 128.317,63.576 131.826,63.576 132.588,64.338 U41.2@132.588,68.678
  other v1: 128.321,63.576
DO_CTRL_12: P1.4 U42.2 | length 85.4
  Top Layer w0.254: P1.4@123.46,3.46 124.663,4.663 124.663,6.731 126.873,8.941 v1(126.873,78.13)
  Bottom Layer w0.254: v1(126.873,78.13) 131.826,78.13 132.588,78.892 U42.2@132.588,82.147
DO_CTRL_13: P1.6 U19.2 | length 100.6
  Top Layer w0.254: P1.6@120.92,3.46 122.149,4.689 122.149,7.747 125.679,11.278 v1(125.679,91.465)
  Bottom Layer w0.254: v1@125.654,91.465 v1(125.679,91.465) 131.75,91.465 132.588,92.304 U19.2@132.588,95.616
DO_CTRL_14: P1.8 U21.2 | length 62
  Top Layer w0.254: P1.8@118.38,3.46 119.685,4.765 119.685,8.255 124.206,12.776 v1(124.206,51.13)
  Bottom Layer w0.254: v1(124.206,51.13) 131.724,51.13 132.588,51.994 U21.2@132.588,55.209
FGND: C54.1 C62.1 C67.2 C68.2 C162.2 D4.1 E138.2 P1.10 P1.12 U6.6 U6.9 U19.3 U20.3 U21.3 U23.3 U29.3 U31.3 U33.3 U35.3 U37.3 U38.3 U39.3 U40.3 U41.3 U42.3 U46.3 U49.5 | length 2.9
  Bottom Layer w0.508: v5(68.275,20.498) 68.91,21.133 U6.6@70.875,21.133
  other v1: 109.402,2.235 111.942,2.235 114.482,2.235 117.022,2.235 119.562,2.235 122.102,2.235 124.642,2.235 127.182,2.235 127.817,3.505 64.952,4.775 66.222,4.775 67.492,4.775 68.762,4.775 70.032,4.775 71.302,4.775 72.572,4.775 73.842,4.775 75.112,4.775 76.382,4.775 77.652,4.775 82.732,4.775 84.002,4.775 85.272,4.775 86.542,4.775 87.812,4.775 111.942,4.775 114.482,4.775 117.022,4.775 61.777,6.045 63.047,6.045 64.317,6.045 65.587,6.045 66.857,6.045 68.127,6.045 69.397,6.045 70.667,6.045 71.937,6.045 73.207,6.045 74.477,6.045 75.747,6.045 77.017,6.045 83.367,6.045 84.637,6.045 62.412,7.315 63.682,7.315 64.952,7.315 66.222,7.315 67.492,7.315 68.762,7.315 70.032,7.315 71.302,7.315 72.572,7.315 73.842,7.315 75.112,7.315 76.382,7.315 82.732,7.315 84.002,7.315 87.812,7.315 89.082,7.315 92.892,7.315 94.162,7.315 95.432,7.315 99.242,7.315 117.022,7.315 57.967,8.585 59.237,8.585 60.507,8.585 61.777,8.585 65.587,8.585 66.857,8.585 68.127,8.585 69.397,8.585 70.667,8.585 74.477,8.585 75.747,8.585 77.017,8.585 82.097,8.585 83.367,8.585 85.907,8.585 87.177,8.585 88.447,8.585 89.717,8.585 90.987,8.585 92.257,8.585 93.527,8.585 94.797,8.585 115.117,8.585 116.387,8.585 99.242,9.855 114.482,9.855 115.752,9.855 117.022,9.855 98.607,11.125 112.577,11.125 113.847,11.125 115.117,11.125 116.387,11.125 117.657,11.125 118.927,11.125 58.602,12.395 61.142,12.395 66.222,12.395 67.492,12.395 68.762,12.395 70.032,12.395 82.732,12.395 89.082,12.395 90.352,12.395 91.622,12.395 92.892,12.395 94.162,12.395 97.972,12.395 99.242,12.395 111.942,12.395 113.212,12.395 114.482,12.395 115.752,12.395 117.022,12.395 118.292,12.395 119.562,12.395 57.967,13.665 60.507,13.665 61.777,13.665 63.047,13.665 64.317,13.665 65.587,13.665 66.857,13.665 68.127,13.665 69.397,13.665 74.477,13.665 83.367,13.665 88.447,13.665 89.717,13.665 90.987,13.665 92.257,13.665 93.527,13.665 98.607,13.665 110.037,13.665 111.307,13.665 112.577,13.665 113.847,13.665 115.117,13.665 116.387,13.665 117.657,13.665 118.927,13.665 120.197,13.665 121.467,13.665 58.602,14.935 61.142,14.935 62.412,14.935 63.682,14.935 64.952,14.935 66.222,14.935 67.492,14.935 68.762,14.935 72.572,14.935 73.842,14.935 75.112,14.935 76.382,14.935 82.732,14.935 87.812,14.935 92.892,14.935 94.162,14.935 109.402,14.935 110.672,14.935 111.942,14.935 113.212,14.935 114.482,14.935 115.752,14.935 117.022,14.935 118.292,14.935 119.562,14.935 120.832,14.935 57.967,16.205 60.507,16.205 61.777,16.205 63.047,16.205 64.317,16.205 73.207,16.205 74.477,16.205 75.747,16.205 77.017,16.205 78.287,16.205 79.557,16.205 80.827,16.205 82.097,16.205 83.367,16.205 88.447,16.205 93.527,16.205 94.797,16.205 107.497,16.205 108.767,16.205 110.037,16.205 111.307,16.205 112.577,16.205 113.847,16.205 115.117,16.205 116.387,16.205 117.657,16.205 118.927,16.205 120.197,16.205 121.467,16.205 58.602,17.475 61.142,17.475 62.412,17.475 63.682,17.475 72.572,17.475 73.842,17.475 75.112,17.475 76.382,17.475 77.652,17.475 78.922,17.475 80.192,17.475 81.462,17.475 82.732,17.475 87.812,17.475 89.082,17.475 92.892,17.475 94.162,17.475 97.972,17.475 106.862,17.475 108.132,17.475 109.402,17.475 110.672,17.475 111.942,17.475 113.212,17.475 114.482,17.475 115.752,17.475 117.022,17.475 118.292,17.475 119.562,17.475 120.832,17.475 57.967,18.745 60.507,18.745 61.777,18.745 63.047,18.745 73.207,18.745 74.477,18.745 88.447,18.745 89.717,18.745 90.987,18.745 92.257,18.745 93.527,18.745 94.797,18.745 98.607,18.745 106.227,18.745 107.497,18.745 108.767,18.745 110.037,18.745 111.307,18.745 112.577,18.745 113.847,18.745 115.117,18.745 116.387,18.745 117.657,18.745 118.927,18.745 120.197,18.745 121.467,18.745 58.602,20.015 61.142,20.015 63.682,20.015 86.542,20.015 87.812,20.015 89.082,20.015 90.352,20.015 91.622,20.015 92.892,20.015 94.162,20.015 97.972,20.015 99.242,20.015 105.592,20.015 106.862,20.015 108.132,20.015 109.402,20.015 110.672,20.015 111.942,20.015 113.212,20.015 114.482,20.015 115.752,20.015 117.022,20.015 118.292,20.015 119.562,20.015 120.832,20.015 57.967,21.285 77.017,21.285 78.287,21.285 79.557,21.285 80.827,21.285 82.097,21.285 83.367,21.285 85.907,21.285 87.177,21.285 88.447,21.285 89.717,21.285 90.987,21.285 92.257,21.285 93.527,21.285 94.797,21.285 98.607,21.285 106.227,21.285 107.497,21.285 108.767,21.285 110.037,21.285 111.307,21.285 112.577,21.285 113.847,21.285 115.117,21.285 116.387,21.285 117.657,21.285 118.927,21.285 120.197,21.285 121.467,21.285 58.602,22.555 75.112,22.555 76.382,22.555 77.652,22.555 78.922,22.555 80.192,22.555 81.462,22.555 82.732,22.555 84.002,22.555 87.812,22.555 89.082,22.555 90.352,22.555 91.622,22.555 92.892,22.555 94.162,22.555 97.972,22.555 105.592,22.555 106.862,22.555 108.132,22.555 109.402,22.555 110.672,22.555 111.942,22.555 113.212,22.555 114.482,22.555 115.752,22.555 117.022,22.555 118.292,22.555 119.562,22.555 120.832,22.555 57.967,23.825 59.237,23.825 60.507,23.825 61.777,23.825 63.047,23.825 64.317,23.825 65.587,23.825 66.857,23.825 68.127,23.825 69.397,23.825 70.667,23.825 71.937,23.825 73.207,23.825 74.477,23.825 75.747,23.825 77.017,23.825 78.287,23.825 79.557,23.825 80.827,23.825 82.097,23.825 83.367,23.825 84.637,23.825 88.447,23.825 89.717,23.825 90.987,23.825 92.257,23.825 93.527,23.825 94.797,23.825 106.227,23.825 71.302,25.095 72.572,25.095 73.842,25.095 75.112,25.095 76.382,25.095 77.652,25.095 78.922,25.095 80.192,25.095 81.462,25.095 82.732,25.095 84.002,25.095 85.272,25.095 87.812,25.095 92.892,25.095 94.162,25.095 97.972,25.095 105.592,25.095 109.402,25.095 110.672,25.095 111.942,25.095 113.212,25.095 114.482,25.095 115.752,25.095 117.022,25.095 118.292,25.095 68.127,26.365 71.937,26.365 73.207,26.365 74.477,26.365 75.747,26.365 77.017,26.365 78.287,26.365 79.557,26.365 80.827,26.365 82.097,26.365 83.367,26.365 84.637,26.365 93.527,26.365 94.797,26.365 98.607,26.365 108.767,26.365 110.037,26.365 111.307,26.365 112.577,26.365 113.847,26.365 115.117,26.365 116.387,26.365 117.657,26.365 82.732,27.635 84.002,27.635 85.272,27.635 86.542,27.635 87.812,27.635 89.082,27.635 92.892,27.635 94.162,27.635 97.972,27.635 99.242,27.635 105.592,27.635 108.132,27.635 109.402,27.635 110.672,27.635 111.942,27.635 113.212,27.635 114.482,27.635 115.752,27.635 83.367,28.905 84.637,28.905 85.907,28.905 87.177,28.905 88.447,28.905 89.717,28.905 90.987,28.905 92.257,28.905 93.527,28.905 94.797,28.905 98.607,28.905 108.767,28.905 110.037,28.905 111.307,28.905 112.577,28.905 113.847,28.905 115.117,28.905 116.387,28.905 118.927,28.905 120.197,28.905 85.272,30.175 86.542,30.175 87.812,30.175 89.082,30.175 90.352,30.175 91.622,30.175 92.892,30.175 97.972,30.175 99.242,30.175 105.592,30.175 108.132,30.175 109.402,30.175 110.672,30.175 111.942,30.175 113.212,30.175 114.482,30.175 115.752,30.175 119.562,30.175 120.832,30.175 84.637,31.445 85.907,31.445 87.177,31.445 88.447,31.445 89.717,31.445 90.987,31.445 92.257,31.445 108.767,31.445 110.037,31.445 111.307,31.445 112.577,31.445 113.847,31.445 115.117,31.445 116.387,31.445 118.927,31.445 120.197,31.445 85.272,32.715 86.542,32.715 87.812,32.715 89.082,32.715 90.352,32.715 95.432,32.715 108.132,32.715 109.402,32.715 110.672,32.715 111.942,32.715 113.212,32.715 114.482,32.715 115.752,32.715 84.637,33.985 85.907,33.985 87.177,33.985 88.447,33.985 89.717,33.985 103.687,33.985 104.957,33.985 106.227,33.985 107.497,33.985 108.767,33.985 110.037,33.985 111.307,33.985 112.577,33.985 113.847,33.985 115.117,33.985 116.387,33.985 85.272,35.255 86.542,35.255 87.812,35.255 92.892,35.255 103.052,35.255 119.562,35.255 120.832,35.255 84.637,36.525 85.907,36.525 87.177,36.525 88.447,36.525 92.257,36.525 93.527,36.525 118.927,36.525 120.197,36.525 85.272,37.795 86.542,37.795 87.812,37.795 91.622,37.795 92.892,37.795 119.562,37.795 84.637,39.065 85.907,39.065 87.177,39.065 88.447,39.065 92.257,39.065 93.527,39.065 85.272,40.335 86.542,40.335 92.892,40.335 84.637,41.605 85.907,41.605 118.927,41.605 120.197,41.605 119.562,42.875 84.637,44.145 118.927,44.145 120.197,44.145 92.892,45.415 94.162,45.415 119.562,45.415 84.637,46.685 84.637,49.225 118.927,49.225 120.197,49.225 121.467,49.225 87.812,50.495 89.082,50.495 90.352,50.495 91.622,50.495 92.892,50.495 94.162,50.495 119.562,50.495 120.832,50.495 84.637,51.765 87.177,51.765 88.447,51.765 89.717,51.765 90.987,51.765 92.257,51.765 93.527,51.765 121.467,51.765 92.892,53.035 94.162,53.035 84.637,54.305 85.907,54.305 93.527,54.305 118.927,54.305 85.272,55.575 86.542,55.575 87.812,55.575 89.082,55.575 90.352,55.575 119.562,55.575 84.637,56.845 85.907,56.845 87.177,56.845 88.447,56.845 89.717,56.845 118.927,56.845 120.197,56.845 85.272,58.115 86.542,58.115 87.812,58.115 89.082,58.115 119.562,58.115 84.637,59.385 85.907,59.385 87.177,59.385 88.447,59.385 93.527,59.385 85.272,60.655 86.542,60.655 87.812,60.655 84.637,61.925 85.907,61.925 87.177,61.925 88.447,61.925 118.927,61.925 121.467,61.925 85.272,63.195 86.542,63.195 87.812,63.195 89.082,63.195 90.352,63.195 119.562,63.195 120.832,63.195 124.642,63.195 84.637,64.465 85.907,64.465 87.177,64.465 88.447,64.465 89.717,64.465 120.197,64.465 121.467,64.465 85.272,65.735 92.892,65.735 94.162,65.735 84.637,67.005 93.527,67.005 87.812,68.275 89.082,68.275 90.352,68.275 84.637,69.545 87.177,69.545 88.447,69.545 89.717,69.545 90.987,69.545 87.812,70.815 89.082,70.815 84.637,72.085 87.177,72.085 88.447,72.085 92.257,72.085 93.527,72.085 87.812,73.355 84.637,74.625 87.177,74.625 88.447,74.625 87.812,75.895 89.082,75.895 90.352,75.895 91.622,75.895 92.892,75.895 94.162,75.895 96.702,75.895 119.562,75.895 120.832,75.895 124.642,75.895 84.637,77.165 87.177,77.165 88.447,77.165 89.717,77.165 90.987,77.165 92.257,77.165 93.527,77.165 120.197,77.165 121.467,77.165 87.812,78.435 89.082,78.435 91.622,78.435 92.892,78.435 94.162,78.435 96.702,78.435 119.562,78.435 120.832,78.435 124.642,78.435 84.637,79.705 92.257,79.705 93.527,79.705 121.467,79.705 92.892,80.975 84.637,82.245 87.177,82.245 88.447,82.245 89.717,82.245 90.987,82.245 87.812,83.515 89.082,83.515 96.702,83.515 124.642,83.515 84.637,84.785 87.177,84.785 88.447,84.785 87.812,86.055 91.622,86.055 92.892,86.055 94.162,86.055 124.642,86.055 84.637,87.325 87.177,87.325 88.447,87.325 87.812,88.595 89.082,88.595 124.642,88.595 84.637,89.865 87.177,89.865 88.447,89.865 89.717,89.865 90.987,89.865 92.257,89.865 93.527,89.865 97.337,89.865 120.197,89.865 121.467,89.865 87.812,91.135 89.082,91.135 90.352,91.135 91.622,91.135 92.892,91.135 94.162,91.135 96.702,91.135 119.562,91.135 120.832,91.135 124.642,91.135 84.637,92.405 92.257,92.405 93.527,92.405 97.337,92.405 121.467,92.405 92.892,93.675 84.637,94.945 87.177,94.945 88.447,94.945 89.717,94.945 87.812,96.215 89.082,96.215 90.352,96.215 84.637,97.485 87.177,97.485 88.447,97.485 87.812,98.755 84.637,100.025 87.177,100.025 88.447,100.025 87.812,101.295 84.637,102.565 87.177,102.565 88.447,102.565 89.717,102.565 90.987,102.565 92.257,102.565 93.527,102.565 97.337,102.565 121.467,102.565 125.277,102.565 87.812,103.835 89.082,103.835 90.352,103.835 91.622,103.835 92.892,103.835 94.162,103.835 96.702,103.835 97.972,103.835 124.642,103.835 84.637,105.105 87.177,105.105 88.447,105.105 89.717,105.105 90.987,105.105 92.257,105.105 93.527,105.105 97.337,105.105 121.467,105.105 125.277,105.105 92.892,106.375 84.637,107.645 93.527,107.645 87.812,108.915 89.082,108.915 90.352,108.915 84.637,110.185 87.177,110.185 88.447,110.185 89.717,110.185 90.987,110.185 98.607,110.185 87.812,111.455 89.082,111.455 90.352,111.455 84.637,112.725 87.177,112.725 88.447,112.725 89.717,112.725 93.527,112.725 87.812,113.995 84.637,115.265 87.177,115.265 88.447,115.265 89.082,116.535 90.352,116.535 91.622,116.535 92.892,116.535 94.162,116.535 96.702,116.535 97.972,116.535 119.562,116.535 120.832,116.535 124.642,116.535 127.182,116.535 84.637,117.805 85.907,117.805 89.717,117.805 90.987,117.805 92.257,117.805 93.527,117.805 97.337,117.805 98.607,117.805 120.197,117.805 121.467,117.805 124.007,117.805 125.277,117.805 85.272,119.075 86.542,119.075 91.622,119.075 92.892,119.075 94.162,119.075 96.702,119.075 97.972,119.075 99.242,119.075 124.642,119.075 84.637,120.345 85.907,120.345 87.177,120.345 88.447,120.345 92.257,120.345 93.527,120.345 85.272,121.615 86.542,121.615 87.812,121.615 89.082,121.615 94.162,121.615 99.242,121.615 124.642,121.615 84.637,122.885 85.907,122.885 87.177,122.885 88.447,122.885 89.717,122.885 90.987,122.885 98.607,122.885 118.927,122.885 120.197,122.885 85.272,124.155 86.542,124.155 87.812,124.155 89.082,124.155 90.352,124.155 99.242,124.155 119.562,124.155 84.637,125.425 85.907,125.425 87.177,125.425 88.447,125.425 89.717,125.425 118.927,125.425 120.197,125.425 85.272,126.695 86.542,126.695 87.812,126.695 89.082,126.695 92.892,126.695 94.162,126.695 95.432,126.695 96.702,126.695 84.637,127.965 85.907,127.965 87.177,127.965 88.447,127.965 85.272,129.235 86.542,129.235 87.812,129.235 89.082,129.235 91.622,129.235 92.892,129.235 94.162,129.235 95.432,129.235 96.702,129.235 97.972,129.235 99.242,129.235 120.832,129.235 84.637,130.505 85.907,130.505 87.177,130.505 88.447,130.505 89.717,130.505 90.987,130.505 92.257,130.505 93.527,130.505 94.797,130.505 96.067,130.505 97.337,130.505 98.607,130.505 85.272,131.775 86.542,131.775 87.812,131.775 89.082,131.775 90.352,131.775 91.622,131.775 92.892,131.775 94.162,131.775 95.432,131.775 96.702,131.775 97.972,131.775 99.242,131.775